# Altium PCB PCB1.pcbdoc
Units mil, origin at the board's own origin, x right, y up, seen from the top; angles counter-clockwise.
Board outline 2865 x 3420 mil, 2 copper layers (Top Layer, Bottom Layer); 17 components, 34 nets, 150 pads, 11 vias.
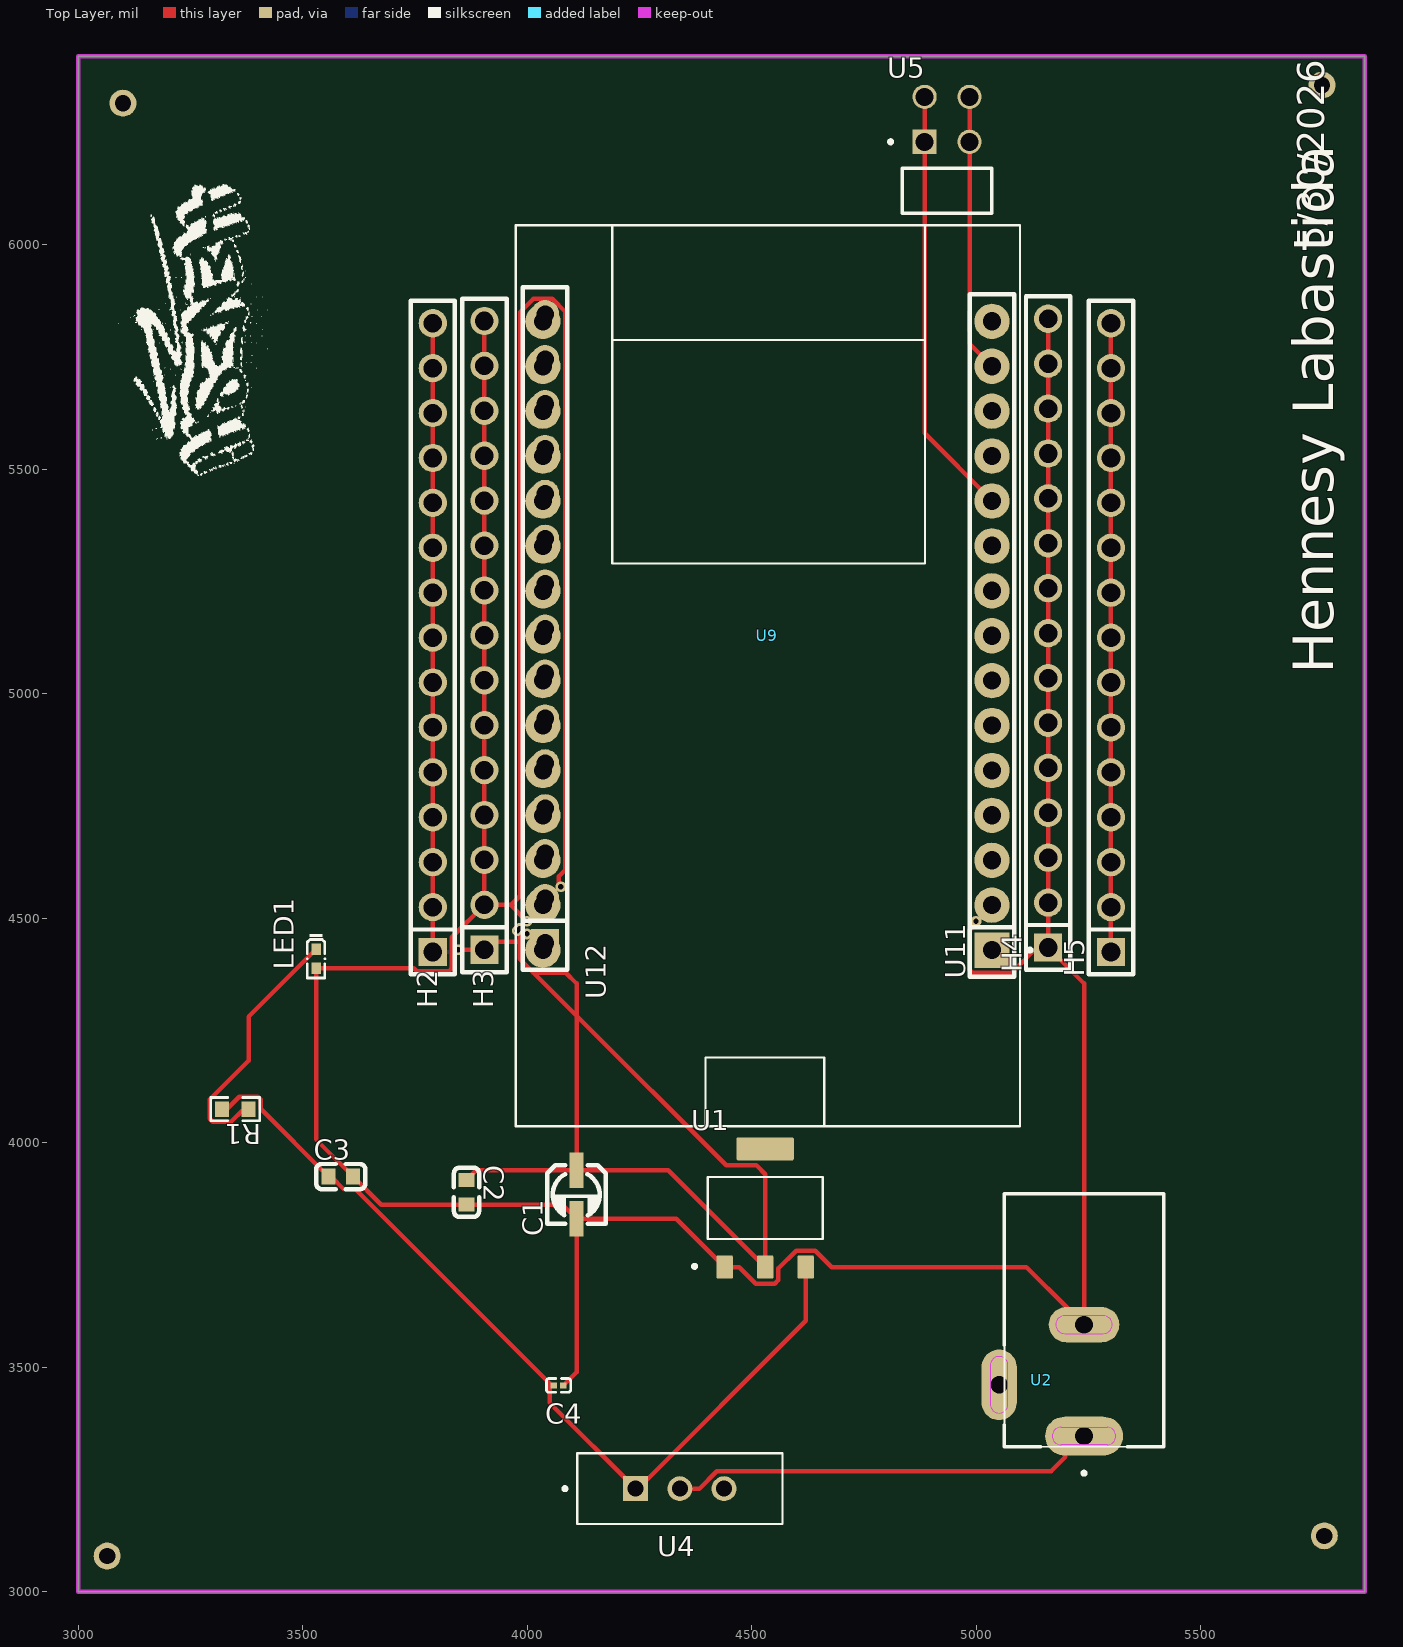
[diagram p0: Top Layer view]
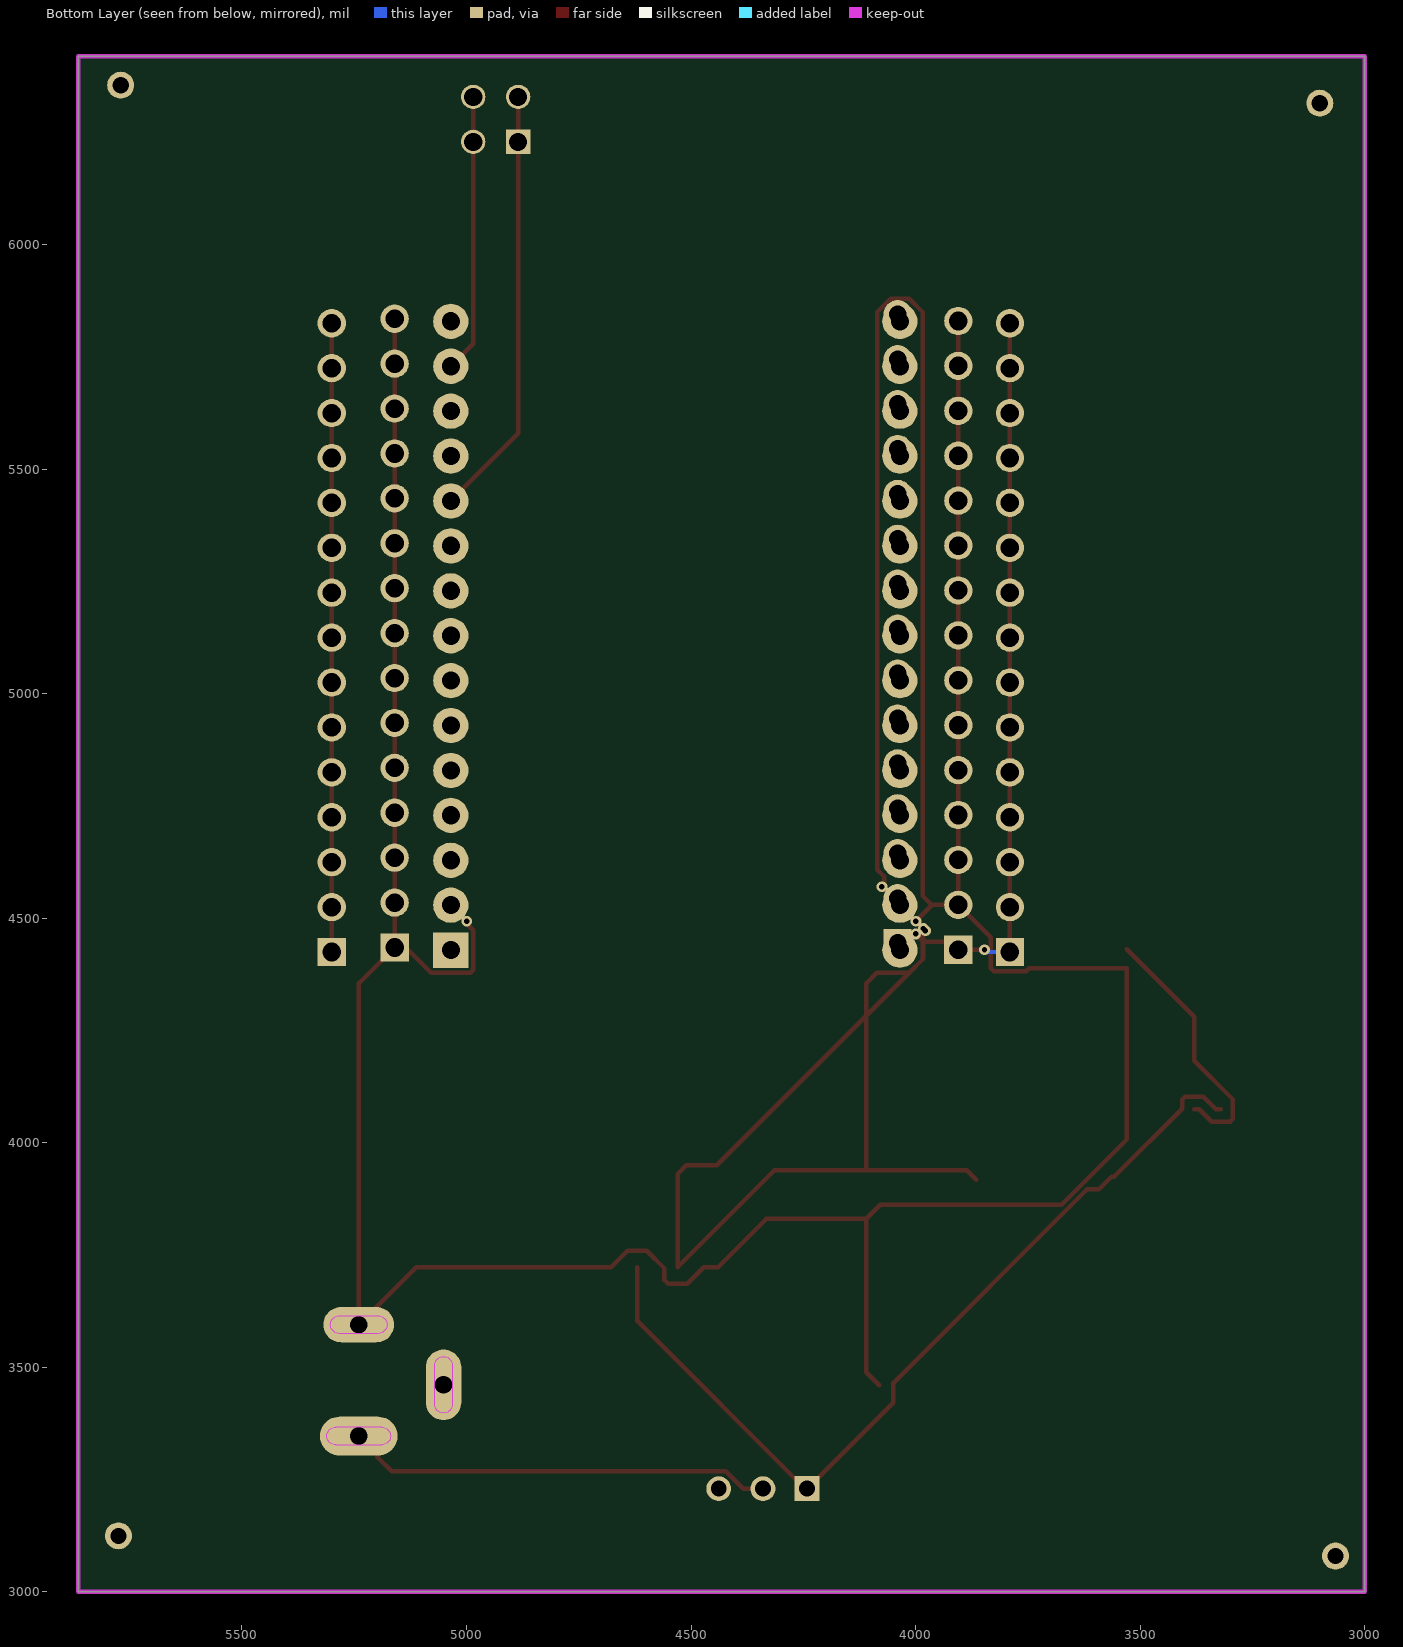
[diagram p1: Bottom Layer view, seen from below]

## Layer stack, top to bottom
Top Layer: signal copper (thickness not stored)
Dielectric: dielectric 12.6, FR-4, Dk 4.8
Bottom Layer: signal copper (thickness not stored)

## Board outline
3000,6420 5865,6420 5865,3000 3000,3000

## Design rules (kind name [scope] priority, off if disabled: settings)
BoardOutlineClearance copperThickness1oz [All] p0: genericclearance=10 ignorepadtopadclearanceinfootprint=FALSE except(0: Arc-SplitContinuation Track-SplitContinuation SMDPad-SplitContinuation THPad-SplitContinuation Via-SplitContinuation Fill-SplitContinuation Poly-SplitContinuation Region-SplitContinuation Text-SplitContinuation; 6: Track-CutoutEdge SMDPad-CutoutEdge THPad-CutoutEdge Via-CutoutEdge Region-CutoutEdge; 11.8: Track-OutlineEdge SMDPad-OutlineEdge THPad-OutlineEdge Via-OutlineEdge Fill-OutlineEdge Region-OutlineEdge Poly-OutlineEdge Text-OutlineEdge Fill-CutoutEdge)
BoardOutlineClearance copperThickness2oz [All] p0: genericclearance=10 ignorepadtopadclearanceinfootprint=FALSE except(0: Arc-SplitContinuation Track-SplitContinuation SMDPad-SplitContinuation THPad-SplitContinuation Via-SplitContinuation Fill-SplitContinuation Poly-SplitContinuation Region-SplitContinuation Text-SplitContinuation; 6: Track-CutoutEdge SMDPad-CutoutEdge THPad-CutoutEdge Via-CutoutEdge Region-CutoutEdge; 11.8: Track-OutlineEdge SMDPad-OutlineEdge THPad-OutlineEdge Via-OutlineEdge Fill-OutlineEdge Region-OutlineEdge Poly-OutlineEdge Text-OutlineEdge Fill-CutoutEdge)
Clearance copperThickness1oz [(InNet('+3V3') OR InNet('+5V') OR InNet('GND') OR InNet('VCC') OR InNet('D13') OR InNet('D12') OR InNet('D14') OR InNet('D27') OR InNet('D26') OR InNet('D25') OR InNet('D33') OR InNet('D32') OR InNet('D35') OR InNet('D34') OR InNet('VN') OR InNet('VP') OR InNet('EN') OR InNet('D15') OR InNet('D2') OR InNet('D4') OR InNet('RX2') OR InNet('TX2') OR InNet('D5') OR InNet('D18') OR InNet('D19') OR InNet('D21') OR InNet('D22') OR InNet('D23') OR InNet('$1N4243') OR InNet('3V3') OR InNet('RX0') OR InNet('TX0') OR InNet('VIN') OR InNet('$1N158'))] p1: gap=7 ignorepadtopadclearanceinfootprint=FALSE except(4: Track-Track; 6: Track-SMDPad SMDPad-SMDPad Track-THPad SMDPad-THPad THPad-THPad Track-Via SMDPad-Via THPad-Via Via-Via SMDPad-Fill THPad-Fill Via-Fill Fill-Fill Track-Region SMDPad-Region THPad-Region Via-Region Region-Region Track-Poly SMDPad-Poly THPad-Poly Via-Poly Fill-Poly Region-Poly Poly-Poly Track-Text SMDPad-Text THPad-Text Via-Text Fill-Text Region-Text Poly-Text Text-Text; 6.9: Track-Hole SMDPad-Hole THPad-Hole Via-Hole Fill-Hole Region-Hole Poly-Hole Text-Hole Sheet-Hole; 11.8: Track-Fill Fill-Region Track-Sheet SMDPad-Sheet THPad-Sheet Via-Sheet Fill-Sheet Region-Sheet Poly-Sheet Text-Sheet)
Clearance copperThickness2oz [All] p1: gap=7 ignorepadtopadclearanceinfootprint=FALSE except(6: Track-SMDPad SMDPad-SMDPad Track-THPad SMDPad-THPad THPad-THPad Track-Via SMDPad-Via THPad-Via Via-Via SMDPad-Fill THPad-Fill Via-Fill Fill-Fill Track-Region SMDPad-Region THPad-Region Via-Region Region-Region Track-Poly SMDPad-Poly THPad-Poly Via-Poly Fill-Poly Region-Poly Poly-Poly Track-Text SMDPad-Text THPad-Text Via-Text Fill-Text Region-Text Poly-Text Text-Text; 6.9: Track-Hole SMDPad-Hole THPad-Hole Via-Hole Fill-Hole Region-Hole Poly-Hole Text-Hole Sheet-Hole; 8: Track-Track; 11.8: Track-Fill Fill-Region Track-Sheet SMDPad-Sheet THPad-Sheet Via-Sheet Fill-Sheet Region-Sheet Poly-Sheet Text-Sheet)
DiffPairsRouting differentialPair [All] p1: maxuncoupledlength=10 minlimit=6 maxlimit=6 mostfreqgap=6 toplayer_minwidth=5 toplayer_prefwidth=10 toplayer_maxwidth=100 bottomlayer_minwidth=5 bottomlayer_prefwidth=10 bottomlayer_maxwidth=100
PasteMaskExpansion pasteMaskExpansion [All] p1: expansion=0
PlaneConnect innerPlane [All] p1: planeconnectstyle=Relief reliefexpansion=20 reliefentries=4 reliefconductorwidth=10 reliefairgap=10
PolygonConnect copperRegion [All] p1: connectstyle=Relief reliefentries=4 reliefconductorwidth=10 polygonreliefangle="90 Angle" airgapwidth=10
RoutingVias viaSize [All] p1: viastyle="Through Hole" holewidth=12.0078 minholewidth=11.811 maxholewidth=248.0314 width=24.0158 minwidth=19.685 maxwidth=393.7008
SolderMaskExpansion solderMaskExpansion [All] p1: useseparateexpansions=TRUE expansion=2 expansionbottom=2
Width copperThickness1oz [All] p1: maxlimit=100 minlimit=5 preferedwidth=10
Width copperThickness2oz [All] p1: maxlimit=100 minlimit=8 preferedwidth=10

## Components (designator, comment, footprint, x,y, rotation, side; value= is the part's Value field where it differs from the comment)
C1 "C_Ele_SMD_3x5.4mm" CAP-SMD_BD3.0-L3.3-W3.3-RD 4110,3885 r90 top
C2 "CAP_0603" C0603 3865,3890 r270 top
C3 "CAP_0603" C0603 3585,3925 r0 top
C4 "CAP_0201" C0201 4070,3460 r0 top
H2 "2011-1X15G00SB" HDR-TH_15P-P2.54-V-M 3790,5125 r90 top
H3 "2011-1X15G00SB" HDR-TH_15P-P2.54-V-M 3905,5130 r90 top
H4 "2011-1X15G00SB" HDR-TH_15P-P2.54-V-M 5160,5135 r90 top
H5 "2011-1X15G00SB" HDR-TH_15P-P2.54-V-M 5300,5125 r90 top
LED1 "LED_0402-R" LED0402-RD_YELLOW 3530,4410 r270 top
R1 "Res_0603" R0603 3350,4075 r180 top
U1 "AMS1117-5.0" SOT229P700X180-4N 4530,3855 r0 top
U2 "DCJ200-10-A-XX-K_REVA" GCT_DCJ200-10-A-XX-K_REVA 5240,3605 r180 top
U4 "MINI-SPDT-SW" SW_MINI-SPDT-SW 4340,3230 r0 top
U5 "MTSW-102-10-L-D-472-RA" SAMTEC_MTSW-102-10-L-D-472-RA 4935,6120 r0 top
U9 "ESP32-DEVKIT-V1" MODULE_ESP32_DEVKIT_V1 4535,5040 r180 top
U11 "HX PM2.54-1x15P ZC" HDR-TH_15P-P2.54-V-F-1 5035,5130 r90 top
U12 "HX PM2.54-1x15P ZC" HDR-TH_15P-P2.54-V-F-1 4040,5145 r90 top

## Footprints (in the part's own frame and the unit in brackets; to place one, negate y for a bottom-side part, rotate by r counter-clockwise, add the part's x,y. Pads: shape width x height; smd on the part's side, far side on the other; paste and mask are expansions set on the pad)
C0201 [mil]
  rect 14.51x12.76 smd: 1(-10.8,0) 2(10.8,0)
  silkscreen extent -27,-15 27,15
C0603 [mm]
  rect 0.8x0.9 smd: 1(-0.7,0) 2(0.7,0)
  silkscreen extent -1.39,-0.71 1.39,0.71
CAP-SMD_BD3.0-L3.3-W3.3-RD [mm]
  rect 2x0.8 smd: 1(1.37,0) 2(-1.37,0)
  silkscreen extent -1.65,-1.64 1.65,1.66
GCT_DCJ200-10-A-XX-K_REVA [mm]
  oval 4.4x2.2 hole 1: 1(0,6.55)
  oval 4x2 hole 1: 2(0,0.25)
  oval 2x4 hole 1: 3(4.8,3.65)
  Board Outline Layer lines w0.003: 5.3,4.75 5.3,2.55 ; 5.3,4.75 5.3,2.55 ; 5.3,4.75 ccw(c4.8,4.75) 4.8,5.25 ; 5.3,4.75 ccw(c4.8,4.75) 4.8,5.25 ; 5.3,2.55 cw(c4.8,2.55) 4.8,2.05 ; 5.3,2.55 cw(c4.8,2.55) 4.8,2.05 ; 4.8,5.25 ccw(c4.8,4.75) 4.3,4.75 ; 4.8,5.25 ccw(c4.8,4.75) 4.3,4.75 ; 4.8,2.05 cw(c4.8,2.55) 4.3,2.55 ; 4.8,2.05 cw(c4.8,2.55) 4.3,2.55 ; 4.3,4.75 4.3,2.55 ; 4.3,4.75 4.3,2.55 ; 1.8,6.55 ccw(c1.3,6.55) 1.3,7.05 ; 1.8,6.55 ccw(c1.3,6.55) 1.3,7.05 ; 1.8,6.55 cw(c1.3,6.55) 1.3,6.05 ; 1.8,6.55 cw(c1.3,6.55) 1.3,6.05 ; 1.6,0.25 cw(c1.1,0.25) 1.1,-0.25 ; 1.6,0.25 cw(c1.1,0.25) 1.1,-0.25 ; 1.6,0.25 ccw(c1.1,0.25) 1.1,0.75 ; 1.6,0.25 ccw(c1.1,0.25) 1.1,0.75 ; 1.3,7.05 -1.3,7.05 ; 1.3,7.05 -1.3,7.05 ; 1.3,6.05 -1.3,6.05 ; 1.3,6.05 -1.3,6.05 ; 1.1,0.75 -1.1,0.75 ; 1.1,0.75 -1.1,0.75 ; 1.1,-0.25 -1.1,-0.25 ; 1.1,-0.25 -1.1,-0.25 ; -1.1,0.75 ccw(c-1.1,0.25) -1.6,0.25 ; -1.1,0.75 ccw(c-1.1,0.25) -1.6,0.25 ; -1.1,-0.25 cw(c-1.1,0.25) -1.6,0.25 ; -1.1,-0.25 cw(c-1.1,0.25) -1.6,0.25 ; -1.3,7.05 ccw(c-1.3,6.55) -1.8,6.55 ; -1.3,7.05 ccw(c-1.3,6.55) -1.8,6.55 ; -1.3,6.05 cw(c-1.3,6.55) -1.8,6.55 ; -1.3,6.05 cw(c-1.3,6.55) -1.8,6.55
  silkscreen extent -4.5,-7.15 4.5,8.75
HDR-TH_15P-P2.54-V-F-1 [mm]
  rect 1.6x1.575 hole 1: 1(-17.78,0)
  round 1.6 hole 1: 2(-15.24,0) 3(-12.7,0) 4(-10.16,0) 5(-7.62,0) 6(-5.08,0) 7(-2.54,0) 8(0,0) 9(2.54,0) 10(5.08,0) 11(7.62,0) 12(10.16,0) 13(12.7,0) 14(15.24,0) 15(17.78,0)
  silkscreen extent -19.3,-1.25 19.3,1.25
HDR-TH_15P-P2.54-V-M [mm]
  rect 1.6x1.6 hole 1.05: 1(-17.78,0)
  round 1.6 hole 1.05: 2(-15.24,0) 3(-12.7,0) 4(-10.16,0) 5(-7.62,0) 6(-5.08,0) 7(-2.54,0) 8(0,0) 9(2.54,0) 10(5.08,0) 11(7.62,0) 12(10.16,0) 13(12.7,0) 14(15.24,0) 15(17.78,0)
  silkscreen extent -19.05,-1.25 19.05,1.25
LED0402-RD_YELLOW [mm]
  rect 0.636x0.54 smd: 1(-0.538,0) 2(0.538,0)
  silkscreen extent -1.39,-0.54 1.09,0.54
MODULE_ESP32_DEVKIT_V1 [mm]
  rect 2x2 hole 1.02: 1(-12.7,15.515)
  round 2 hole 1.02: 2(-12.7,12.975) 3(-12.7,10.435) 4(-12.7,7.895) 5(-12.7,5.355) 6(-12.7,2.815) 7(-12.7,0.275) 8(-12.7,-2.265) 9(-12.7,-4.805) 10(-12.7,-7.345) 11(-12.7,-9.885) 12(-12.7,-12.425) 13(-12.7,-14.965) 14(-12.7,-17.505) 15(-12.7,-20.045) 16(12.7,-20.045) 17(12.7,-17.505) 18(12.7,-14.965) 19(12.7,-12.425) 20(12.7,-9.885) 21(12.7,-7.345) 22(12.7,-4.805) 23(12.7,-2.265) 24(12.7,0.275) 25(12.7,2.815) 26(12.7,5.355) 27(12.7,7.895) 28(12.7,10.435) 29(12.7,12.975) 30(12.7,15.515)
  silkscreen extent -14.95,-25.48 14.23,25.48
R0603 [mil]
  rect 31.75x34.02 smd: 1(-29.66,0) 2(29.66,0)
  silkscreen extent -55,-26 55,26
SAMTEC_MTSW-102-10-L-D-472-RA [mm]
  rect 1.37x1.37 hole 1.02: 01(-1.27,2.77)
  round 1.37 hole 1.02: 02(-1.27,5.31) 03(1.27,2.77) 04(1.27,5.31)
  silkscreen extent -3.29,-1.27 2.54,2.87
SOT229P700X180-4N [mm]
  rrect15% 0.93x1.31 smd: 1(-2.29,-3.345) 2(0,-3.345) 3(2.29,-3.345)
  rrect15% 3.24x1.31 smd: 4(0,3.345)
  silkscreen extent -4.09,-3.4 3.25,1.75
SW_MINI-SPDT-SW [mm]
  rect 1.408x1.408 hole 0.9: 1(-2.5,0)
  round 1.408 hole 0.9: 2(0,0) 3(2.5,0)
  silkscreen extent -6.6,-2 5.8,2

## Free pads (board coordinates)
  round 60 hole 36: 1(3100,6315) 1(5775,3125) 2(3065,3080) 3(5770,6355)

## Via types
v1: diameter 24.02, hole 12.01, Top Layer to Bottom Layer, 11 vias

## Nets (pads, with @x,y where several pads share a name; then routed paths per layer and width w, separated by ;. In a path a pad name is that pad's centre, name@x,y a point inside that pad or via, vN(x,y) a via of type N, cw(c..) or ccw(c..) an arc to the next point about the centre after c; other vN are vias at no path point)
3V3: U9.1
$1N158: LED1.1 R1.1 | length 576.2
  Top Layer w10: R1.1 3368.76,4075 3340.77,4047.01 3299.91,4047.01 3293.48,4053.44 3293.48,4096.56 3379.66,4182.74 3379.66,4280.85 LED1.1
$1N4243: U2.1 U4.2 | length 887.8
  Top Layer w10: U4.2 4383.69,3230 4422.39,3268.7 5166.57,3268.7 5198.5,3300.63
+3V3: H5.1 H5.2 H5.3 H5.4 H5.5 H5.6 H5.7 H5.8 H5.9 H5.10 H5.11 H5.12 H5.13 H5.14 H5.15 U11.1 | length 1400
  Top Layer w10: H5.1 H5.2 H5.3 H5.4 H5.5 H5.6 H5.7 H5.8 H5.9 H5.10 H5.11 H5.12 H5.13 H5.14 H5.15
+5V: C1.1 C2.1 H2.1 H2.2 H2.3 H2.4 H2.5 H2.6 H2.7 H2.8 H2.9 H2.10 H2.11 H2.12 H2.13 H2.14 H2.15 H3.1 U1.2 U12.1 | length 3973.2
  Top Layer w10: H2.1 H2.2 H2.3 H2.4 H2.5 H2.6 H2.7 H2.8 H2.9 H2.10 H2.11 H2.12 H2.13 H2.14 H2.15 ; v1(3846.5,4430) H3.1 3923.12,4448.12 3982.74,4448.12 3983.14,4448.52 ; C2.1 3886.38,3938.94 C1.1 ; v1(3983.14,4477.31) 3983.14,4448.52 ; v1(3999.81,4465.19) 3984.65,4450.03 ; 3983.14,4448.52 3983.14,4409.83 3984.65,4408.32 ; 3983.14,4448.52 3984.65,4450.03 ; 3984.65,4408.32 3984.65,4450.03 ; 3984.65,4408.32 4014.14,4378.82 ; 4014.14,4378.82 4086.18,4378.82 4110,4355 4110,4282.96 ; 4014.14,4378.82 4110,4282.96 ; C1.1 4314.37,3938.94 U1.2 4530,3930.45 4510.52,3949.92 4443.04,3949.92 4110,4282.96 ; C1.1 4110,4282.96
  Bottom Layer w10: H2.1 3841.5,4425 v1(3846.5,4430)
  other v1: 3999.81,4465.19 3978.18,4472.35
D2: U9.4 U11.4
D4: U9.5 U11.5
D5: U9.8 U11.8
D12: U9.27 U12.4
D13: U9.28 U12.3
D14: U9.26 U12.5
D15: U9.3 U11.3
D18: U9.9 U11.9
D19: U9.10 U11.10
D21: U5.01 U5.02 U9.11 U11.11 | length 961.2
  Top Layer w10: U5.02 U5.01 4885,5580 U11.11
D22: U5.03 U5.04 U9.14 U11.14 | length 620.9
  Top Layer w10: U5.04 U5.03 4985,5850.39 4984.65,5850.03 4984.65,5808.32 4985,5807.96 4985,5779.17 U9.14
D23: U9.15 U11.15
D25: U9.23 U12.8
D26: U9.24 U12.7
D27: U9.25 U12.6
D32: U9.21 U12.10
D33: U9.22 U12.9
D34: U9.19 U12.12
D35: U9.20 U12.11
EN: U9.16 U12.15
GND: C1.2 C2.2 C3.2 C4.2 H3.2 H3.3 H3.4 H3.5 H3.6 H3.7 H3.8 H3.9 H3.10 H3.11 H3.12 H3.13 H3.14 H3.15 H4.1 H4.2 H4.3 H4.4 H4.5 H4.6 H4.7 H4.8 H4.9 H4.10 H4.11 H4.12 H4.13 H4.14 H4.15 LED1.2 U1.1 U2.2 U11.2 U12.2 | length 9866.7
  Top Layer w10: H3.15 H3.14 H3.13 H3.12 H3.11 H3.10 H3.9 H3.8 H3.7 H3.6 H3.5 H3.4 H3.3 3905,4540.83 H3.2@3915.83,4530 ; v1(3999.39,4493.57) 3962.96,4530 ; v1@4070.19,4565.19 4070.19,4593.15 4085.35,4608.32 4085.35,5850.03 4055.86,5879.53 4014.14,5879.53 3984.65,5850.03 3984.65,4550.03 3964.61,4530 3962.96,4530 ; C4.2 4110,3489.2 C1.2 ; v1(4999.39,4493.57) 4999.39,4487.84 4984.65,4473.09 4984.65,4385.25 4991.08,4378.82 5078.92,4378.82 5135.1,4435 H4.1 ; H4.15 H4.14 H4.13 H4.12 H4.11 H4.10 H4.9 H4.8 H4.7 H4.6 H4.5 H4.4 H4.3 H4.2 H4.1 ; U2.2@5203.5,3631.65 5111.85,3723.31 4678.18,3723.31 4641.41,3760.08 4598.91,3760.08 4559.29,3720.46 4559.29,3694.58 4551.25,3686.54 4508.75,3686.54 4471.98,3723.31 U1.1 4332.09,3831.06 C1.2 ; U2.2@5235,3590.16 U2.2@5235,3593.03 ; U2.2 U2.2@5240,3598.03 ; U2.2@5240,3631.65 5240,4355 H4.1 ; H3.2@3915.83,4530 H3.2 3832.48,4457.48 3832.48,4388.95 3826.05,4382.52 3753.95,4382.52 3747.66,4388.81 LED1.2 3530,4007.56 C3.2 3675.12,3862.44 C2.2 4078.62,3862.44 C1.2 ; H3.2@3915.83,4530 3962.96,4530
  other v1: 4999.39,4493.57 4999.39,4493.57 4999.39,4493.57 4075.15,4570.15
RX0: U9.12 U11.12
RX2: U9.6 U11.6
TX0: U9.13 U11.13
TX2: U9.7 U11.7
VCC: C3.1 C4.1 R1.2 U1.3 U4.1 | length 1987.1
  Top Layer w10: R1.2 3331.24,4075 3359.23,4102.99 3400.09,4102.99 3406.52,4096.56 3406.52,4075.92 C3.1 3563.56,3925 3592.26,3896.3 3618.7,3896.3 4050,3465 4050,3421.57 U4.1 ; U4.1@4241.57,3225 4620.16,3603.58 U1.3
VIN: U9.30
VN: U9.18 U12.13
VP: U9.17 U12.14
pads on no net: U1.4 U2.3 U4.3 U9.2 U9.29

## Keep-outs
Board Outline Layer:
  the board outline again, w10

## Silkscreen, mask and mechanical layers (free items; w line width, h text height)
Top Silkscreen Layer:
  drawing of 717 lines, arcs and shapes, not listed
  text "5/30/2026" at 5775,5990 h60 r90
  text "Hennesy Labastida" at 5795,5045 h90 r90